# Altium PCB Encoder_MA702.PcbDoc
Units mm, origin at the board's own origin, x right, y up, seen from the top; angles counter-clockwise.
Board outline 19 x 19 mm, 2 copper layers (Top Layer, Bottom Layer), stack 0.8 mm thick; 6 components, 9 nets, 42 pads, 22 vias.
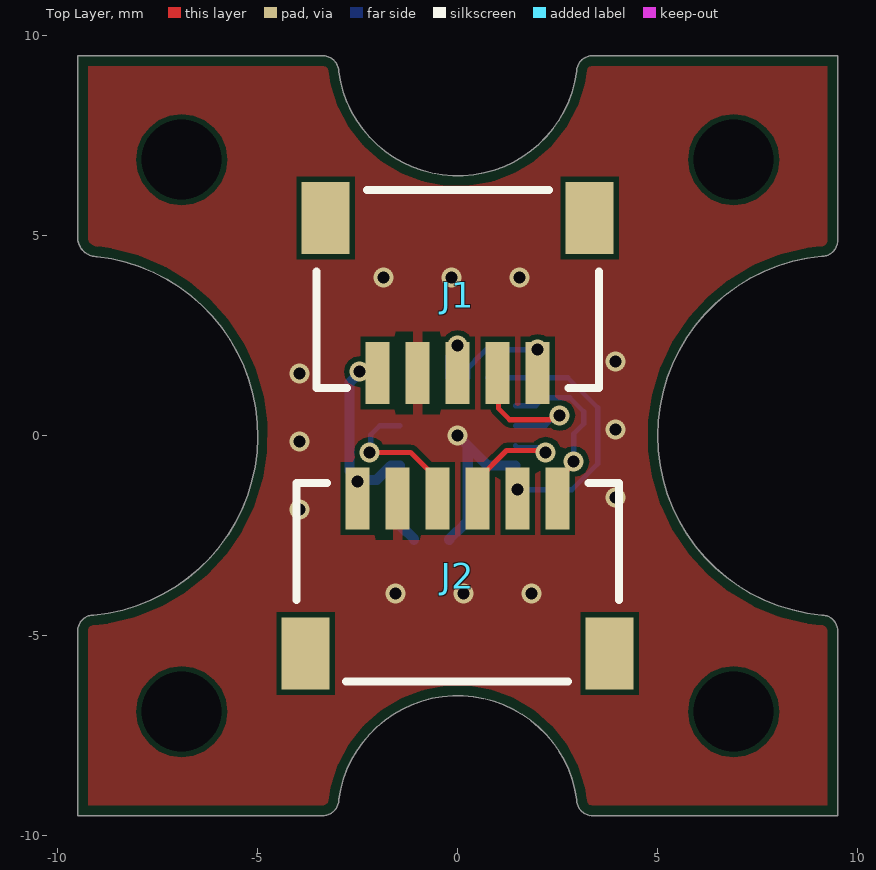
[diagram p0: Top Layer view]
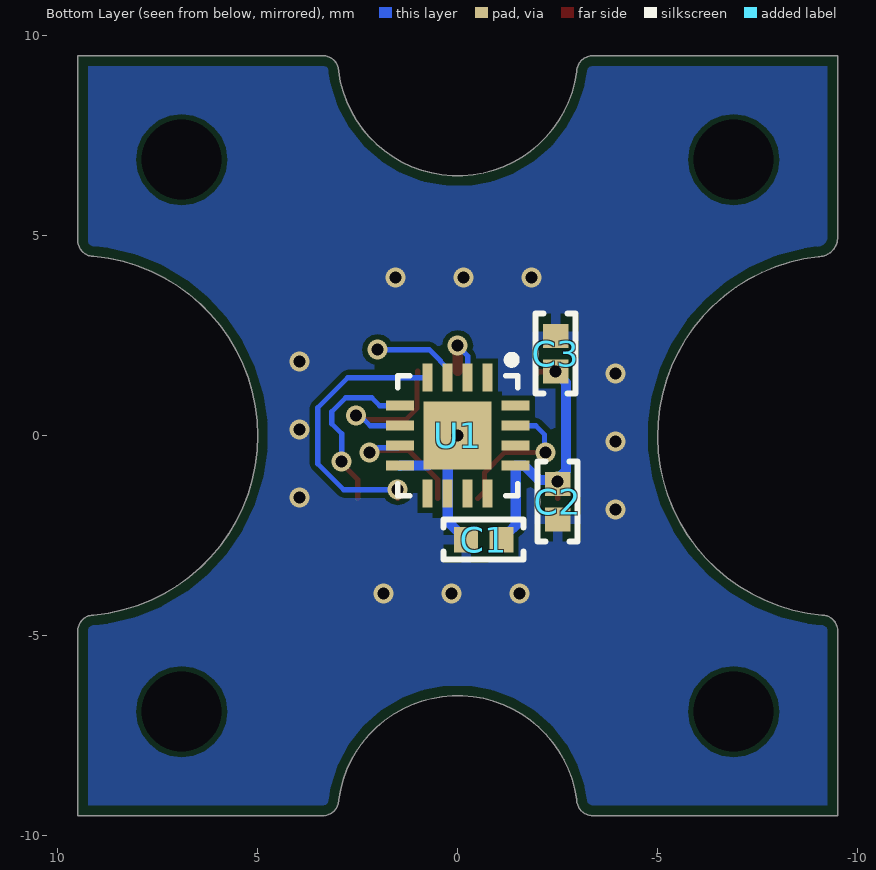
[diagram p1: Bottom Layer view, seen from below]
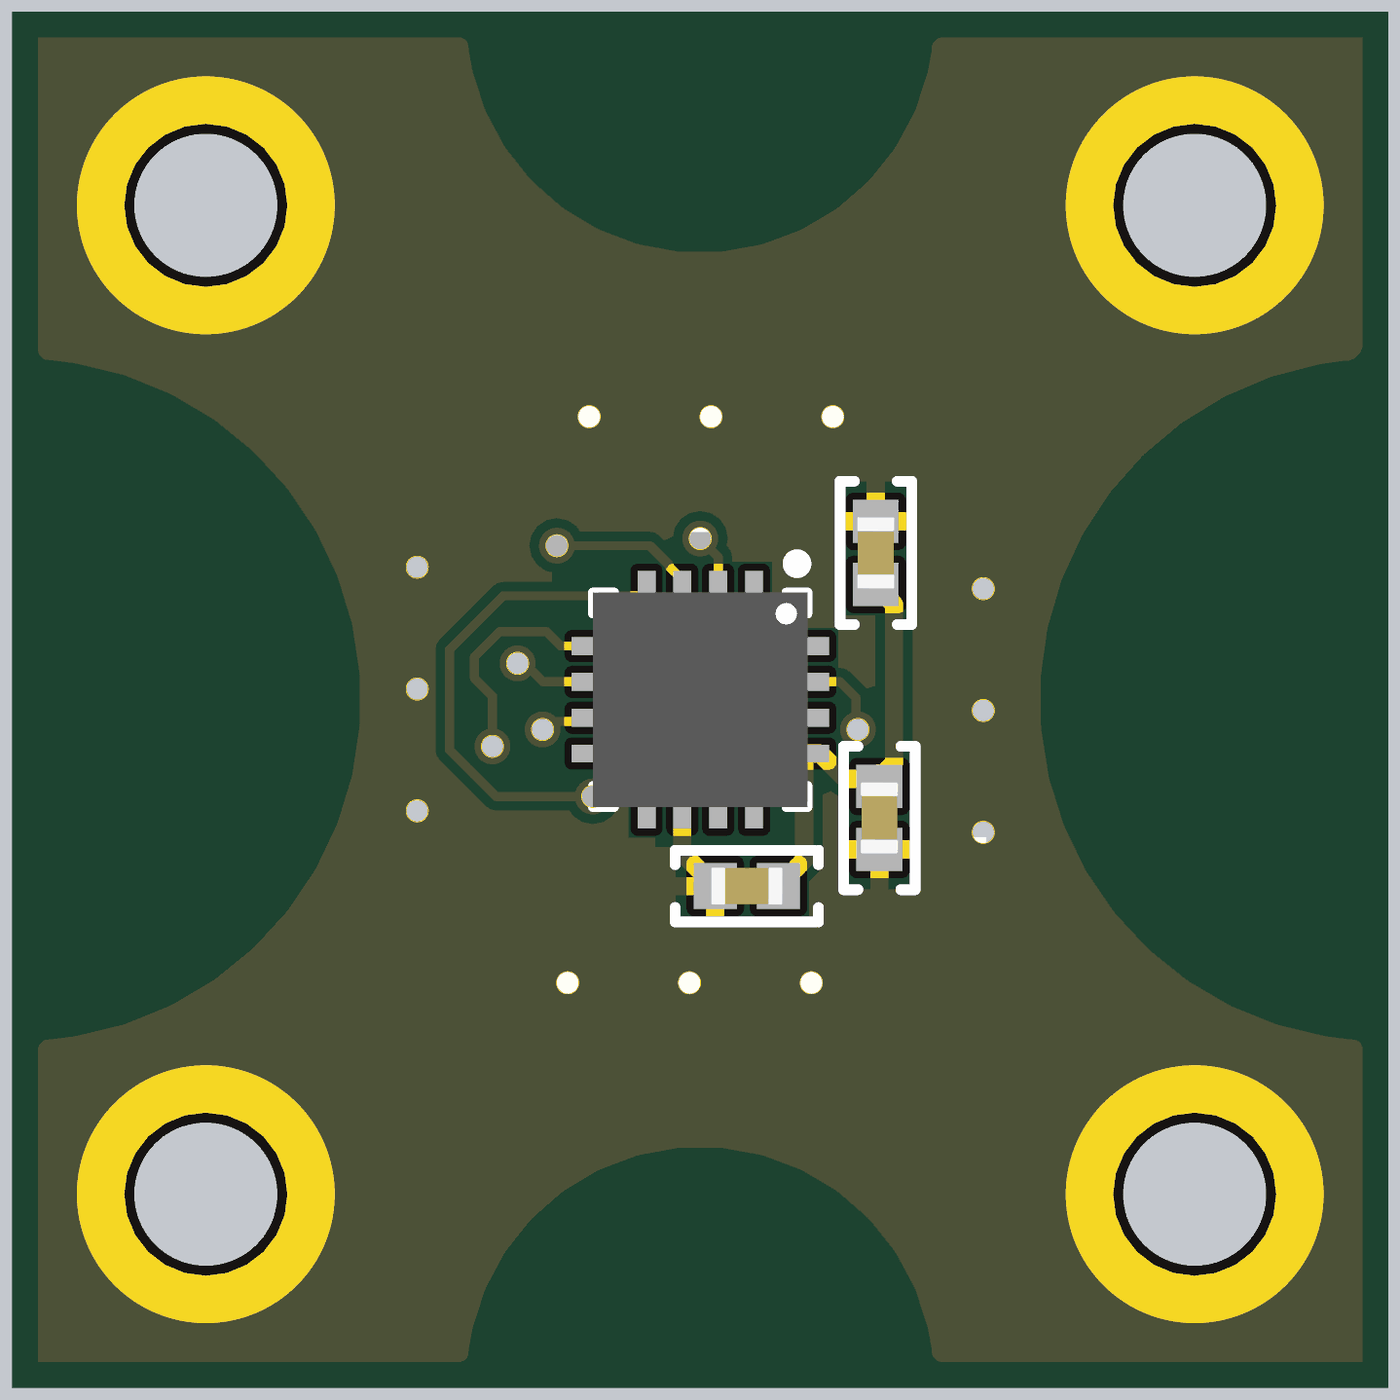
[diagram p2: 3D render of the assembled board from below, using the file's embedded part models]

## Layer stack, top to bottom
Top Solder: solder mask 0.01, Solder Resist, Dk 3.5
Top Layer: signal copper 0.035
Dielectric 1: dielectric 0.73, FR-4, Dk 4.8
Bottom Layer: signal copper 0.035
Bottom Solder: solder mask 0.01, Solder Resist, Dk 3.5

## Board outline
-9.5,-9.5 -3.378,-9.5 ccw(c-3.378,-9.097) -2.974,-9.097 cw(c0,-9.5) 2.975,-9.103 ccw(c3.372,-9.103) 3.372,-9.5 9.5,-9.5 9.5,-4.886 ccw(c9.097,-4.886) 9.097,-4.483 cw(c9.5,0) 9.097,4.483 ccw(c9.097,4.886) 9.5,4.886 9.5,9.5 3.367,9.5 ccw(c3.367,9.11) 2.976,9.11 cw(c0,9.5) -2.974,9.097 ccw(c-3.378,9.097) -3.378,9.5 -9.5,9.5 -9.5,4.961 ccw(c-9.014,4.961) -9.014,4.475 cw(c-9.5,0) -9.101,-4.483 ccw(c-9.101,-4.882) -9.5,-4.882

## Design rules (kind name [scope] priority, off if disabled: settings)
BoardOutlineClearance [All] p1: gap=0.254 ignorepadtopadclearanceinfootprint=FALSE except(0: Arc-SplitContinuation Track-SplitContinuation SMDPad-SplitContinuation THPad-SplitContinuation Via-SplitContinuation Fill-SplitContinuation Poly-SplitContinuation Region-SplitContinuation Text-SplitContinuation)
Clearance [All] p1: gap=0.128 ignorepadtopadclearanceinfootprint=FALSE
PlaneConnect [All] p1: pad.planeconnectstyle=Relief pad.reliefexpansion=0.508 pad.reliefentries=4 pad.reliefconductorwidth=0.254 pad.reliefairgap=0.254 via.planeconnectstyle=Direct via.reliefexpansion=0.508 via.reliefentries=4 via.reliefconductorwidth=0.254 via.reliefairgap=0.254
PolygonConnect [All] p1: thpad.connectstyle=Relief thpad.reliefconductorwidth=0.254 thpad.reliefentries=4 thpad.polygonreliefangle="90 Angle" thpad.airgapwidth=0.254 smdpad.connectstyle=Relief smdpad.reliefconductorwidth=0.254 smdpad.reliefentries=4 smdpad.polygonreliefangle="90 Angle" smdpad.airgapwidth=0.254 via.connectstyle=Direct via.reliefconductorwidth=0.254 via.reliefentries=4 via.polygonreliefangle="90 Angle" via.airgapwidth=0.254
RoutingVias [All] p1: holewidth=0.3 width=0.5 viastyle="Through Hole" minholewidth=0.3 minwidth=0.5 maxholewidth=0.7 maxwidth=1.27
SolderMaskExpansion [All] p1: expansion=0.102 istentingtop=FALSE
SupplyNets "Schematic Supply Nets_1" [InNet('GND')] p1: voltage=0.000
SupplyNets "Schematic Supply Nets" [InNet('VCC')] p2: voltage=0.000
Width [All] p1: maxlimit=0.254 minlimit=0.127 preferedwidth=0.254
29 further rules are at their usual default settings.

## Components (designator, comment, footprint, x,y, rotation, side; value= is the part's Value field where it differs from the comment)
C1 "0.1 µF" "CAP 0402_1005" -0.65,-2.6 r0 bottom
C2 "0.1 µF" "CAP 0402_1005" -2.5,-1.65 r270 bottom
C3 "0.1 µF" "CAP 0402_1005" -2.45,2.05 r90 bottom
J1 "SM05B-SRSS-TB(LF)(SN)" "JST SM05B-SRSS-TB" 0,3.6 r0 top
J2 "SM06B-SRSS-TB(LF)(SN)" "JST SM06B-SRSS-TB" 0,-3.6 r180 top
U1 "MA702" IC_MA702GQ-Z 0,0 r270 bottom

## Footprints (in the part's own frame and the unit in brackets; to place one, negate y for a bottom-side part, rotate by r counter-clockwise, add the part's x,y. Pads: shape width x height; smd on the part's side, far side on the other; paste and mask are expansions set on the pad)
"CAP 0402_1005" [mm] "Chip Capacitor, 2-Leads, Body 1.02x0.51mm, IPC Medium Density"
  rect 0.6x0.64 smd: 1(-0.44,0) 2(0.44,0)
  silkscreen extent -1,-0.5 1,0.5, body extent -0.5,-0.26 0.5,0.26, height 0.52
IC_MA702GQ-Z [mm]
  rect 0.7x0.25 smd: 1(-1.45,0.75) 2(-1.45,0.25) 3(-1.45,-0.25) 4(-1.45,-0.75) 9(1.45,-0.75) 10(1.45,-0.25) 11(1.45,0.25) 12(1.45,0.75)
  rect 0.25x0.7 smd: 5(-0.75,-1.445) 6(-0.25,-1.445) 7(0.25,-1.445) 8(0.75,-1.445) 13(0.75,1.45) 14(0.25,1.45) 15(-0.25,1.45) 16(-0.75,1.45)
  rect 1.7x1.7 smd paste-0.328: 17(0,0)
  silkscreen extent -2,-1.5 1.5,1.5, body extent -1.5,-1.5 1.5,1.5, height 1
"JST SM05B-SRSS-TB" [mm] "1.0mm pitch/Disconnectable Crimp style connector"
  rect 0.6x1.55 smd: 1(-2,-2.032) 2(-1,-2.032) 3(0,-2.032) 4(1,-2.032) 5(2,-2.032)
  rect 1.2x1.8 smd: M(-3.3,1.843) M(3.3,1.843)
  silkscreen extent -3.53,-2.41 3.53,2.54, body extent -3.5,-2.38 3.5,2.57, height 2.95
"JST SM06B-SRSS-TB" [mm] "1.0mm pitch/Disconnectable Crimp style connector"
  rect 0.6x1.55 smd: 1(-2.5,-2.032) 2(-1.5,-2.032) 3(-0.5,-2.032) 4(0.5,-2.032) 5(1.5,-2.032) 6(2.5,-2.032)
  rect 1.2x1.8 smd: M(-3.8,1.843) M(3.8,1.843)
  silkscreen extent -4.03,-2.41 4.03,2.54, body extent -4,-2.38 4,2.57, height 2.95

## Part data
C1 C2 C3: library part C0402C104K3RAC7867, "CAP CER 0.1UF 25V X7R 0402", Device Package="0402 (1005 Metric)", Manufacturer=KEMET, Operating Temperature="-55°C ~ 125°C", Supplier Part Number 1=399-14148-1-ND, Temperature Coefficient=X7R, Tolerance=±10%, Voltage - Rated=25V, Applications="Bypass, Decoupling", Capacitance="0.1 µF", ComponentLink1Description=Datasheet, ComponentLink1URL=https://api.kemet.com/component-edge/download/datasheet/C0402C104K3RAC7867.pdf, ComponentLink2Description="DigiKey Link", ComponentLink2URL=https://www.digikey.com/en/products/detail/kemet/C0402C104K3RAC7867/6697176, LastUpdated="2/9/2024 8:04:32 PM", Lifecycle Status=Active, Minimum Order=1, Mounting Type="Surface Mount, MLCC", Package / Case="0402 (1005 Metric)", Packaging=TapeAndReel, Part Number=C0402C104K3RAC7867, Part Status=Active, PartId=39011, Price=0.02, Series="SMD Comm X7R", Size / Dimension="0.039\" L x 0.020\" W (1.00mm x 0.50mm)", Supplier 1=DigiKey, Thickness (Max)="0.022\" (0.55mm)"
J1: "CONN HEADER SMD R/A 5POS 1MM", Current Rating (Amps)=0.7A, Insulation Color=Natural, Manufacturer="JST Sales America Inc.", Material Flammability Rating="UL94 V-0", Operating Temperature="-25°C ~ 85°C", Supplier Part Number 1=455-1805-1-ND, Voltage Rating=50V, ComponentLink1Description=Datasheet, ComponentLink1URL=http://www.jst-mfg.com/product/pdf/eng/eSH.pdf, ComponentLink2Description="DigiKey Link", ComponentLink2URL=http://digikey.com/product-detail/en/jst-sales-america-inc/SM05B-SRSS-TB-LF-SN/455-1805-1-ND/926876, Connector Type=Header, Contact Finish - Mating=Tin, Contact Finish - Post=Tin, Contact Material="Copper Alloy", Contact Shape=Square, Contact Type="Male Pin", Fastening Type=Push-Pull, Features="Solder Retention", Insulation Height="0.114\" (2.90mm)", Insulation Material="Polyamide (PA), Nylon", LastUpdated="1/12/2020 11:42:04 PM", Lifecycle Status=Active, Minimum Order=1, Mounting Type="Surface Mount, Right Angle", Number of Positions=5, Number of Positions Loaded=All, Number of Rows=1, Packaging=TapeAndReel, Part Number=SM05B-SRSS-TB(LF)(SN), Part Status=Active, PartId=63, Pitch - Mating="0.039\" (1.00mm)", Price=0.32, Series=SR, Shrouding="Shrouded - 4 Wall", Style="Board to Cable/Wire", Supplier 1=DigiKey, Termination=Solder
J2: "CONN HEADER SMD R/A 6POS 1MM", Current Rating (Amps)=0.7A, Insulation Color=Natural, Manufacturer="JST Sales America Inc.", Material Flammability Rating="UL94 V-0", Operating Temperature="-25°C ~ 85°C", Supplier Part Number 1=455-1806-1-ND, Voltage Rating=50V, ComponentLink1Description=Datasheet, ComponentLink1URL=http://www.jst-mfg.com/product/pdf/eng/eSH.pdf, ComponentLink2Description="DigiKey Link", ComponentLink2URL=http://digikey.com/product-detail/en/jst-sales-america-inc/SM06B-SRSS-TB-LF-SN/455-1806-1-ND/926877, Connector Type=Header, Contact Finish - Mating=Tin, Contact Finish - Post=Tin, Contact Material="Copper Alloy", Contact Shape=Square, Contact Type="Male Pin", Fastening Type=Push-Pull, Features="Solder Retention", Insulation Height="0.114\" (2.90mm)", Insulation Material="Polyamide (PA), Nylon", LastUpdated="1/12/2020 11:42:14 PM", Lifecycle Status=Active, Minimum Order=1, Mounting Type="Surface Mount, Right Angle", Number of Positions=6, Number of Positions Loaded=All, Number of Rows=1, Packaging=TapeAndReel, Part Number=SM06B-SRSS-TB(LF)(SN), Part Status=Active, PartId=64, Pitch - Mating="0.039\" (1.00mm)", Price=0.36, Series=SR, Shrouding="Shrouded - 4 Wall", Style="Board to Cable/Wire", Supplier 1=DigiKey, Termination=Solder
U1: "Hall effect encoder"

## Free pads (board coordinates)
  round 0 hole 2 unplated: 1(-6.9,-6.9) 1(-6.9,6.9) 1(6.9,-6.9) 1(6.9,6.9)

## Via types
v1: diameter 0.5, hole 0.3, Top Layer to Bottom Layer, tented both sides, 22 vias

## Nets (pads, with @x,y where several pads share a name; then routed paths per layer and width w, separated by ;. In a path a pad name is that pad's centre, name@x,y a point inside that pad or via, vN(x,y) a via of type N, cw(c..) or ccw(c..) an arc to the next point about the centre after c; other vN are vias at no path point)
A: J1.3 U1.2 | length 1.5
  Top Layer w0.254: J1.3@0,1.618 v1(0,2.25)
  Bottom Layer w0.127: U1.2 -0.25,1.991 0,2.241 v1(0,2.25)
B: J1.4 U1.6 | length 3.8
  Top Layer w0.127: J1.4@1,1.618 1,1.468 1.023,1.445 1.023,0.677 1.3,0.4 2.3,0.4 2.337,0.437 2.478,0.437 v1(2.549,0.509)
  Bottom Layer w0.127: U1.6 2.189,0.25 2.448,0.509 v1(2.549,0.509)
C\S\: J2.1 U1.5 | length 4.4
  Top Layer w0.127: J2.1 2.5,-1.093 2.9,-0.693 v1(2.9,-0.65)
  Bottom Layer w0.127: U1.5 1.95,0.75 2.15,0.95 2.8,0.95 3.15,0.6 3.15,0.3 2.9,0.05 v1(2.9,-0.65)
GND: C1.2 C2.2 C3.2 J1.2 J2.5 U1.8 U1.10 U1.17 | length 4.3
  Bottom Layer w0.254: C1.2 -0.21,-2.58 -0.037,-2.407 -0.017,-2.407 0.25,-2.14 U1.17@0.25,-0.25 ; v1(0,0) U1.17@0.25,-0.25 ; U1.8 1.443,-0.748 0.748,-0.748 U1.17@0.25,-0.25
  other v1: -1.55,-3.95 0.15,-3.95 1.85,-3.95 -3.95,-1.85 3.95,-1.55 -3.95,-0.15 3.95,0.15 -3.95,1.55 3.95,1.85 -1.85,3.95 -0.15,3.95 1.55,3.95
I: J1.5 U1.3 | length 2.2
  Bottom Layer w0.127: U1.3 0.25,1.675 0.433,1.859 0.433,1.879 0.704,2.15 v1(2,2.15)
MISO: J2.3 U1.7 | length 3.3
  Top Layer w0.127: J2.3 0.5,-1.093 1.222,-0.371 2.156,-0.371 v1(2.2,-0.415)
  Bottom Layer w0.127: U1.7 1.496,-0.301 1.986,-0.301 2.099,-0.415 v1(2.2,-0.415)
MOSI: J2.2 U1.4 | length 6.9
  Top Layer w0.127: J2.2 v1(1.5,-1.35)
  Bottom Layer w0.127: U1.4 2.75,1.45 3.5,0.7 3.5,-0.7 2.85,-1.35 v1(1.5,-1.35)
SCLK: J2.4 U1.15 | length 3.7
  Top Layer w0.127: v1(-2.2,-0.415) -1.178,-0.415 -0.673,-0.92 -0.673,-1.395 J2.4
  Bottom Layer w0.127: v1(-2.2,-0.415) -2.175,-0.39 -2.175,0.025 -1.95,0.25 U1.15
VCC: C1.1 C2.1 C3.1 J1.1 J2.6 U1.13 | length 7
  Top Layer w0.127: J2.6 v1(-2.5,-1.15) ; v1(-2.45,1.6) -2.032,1.6 J1.1
  Bottom Layer w0.254: v1(-2.45,1.6) -2.45,1.583 -2.705,1.328 -2.705,-0.878 -2.5,-1.083 v1(-2.5,-1.15) -2.453,-1.103 -2.024,-1.103 -1.671,-0.75 U1.13 -1.45,-2.24 -1.283,-2.407 -1.263,-2.407 -1.09,-2.58 C1.1
pads on no net: J1.M J2.M U1.1 U1.9 U1.11 U1.12 U1.14 U1.16

## Polygon pours and split planes (outlines as drawn)
GND on Bottom Layer "NONET_L02_P-001" (solid, pour order 0): -9.5,9.5 -9.5,-9.5 9.5,-9.5 9.5,9.5
GND on Top Layer "NONET_L02_P-001" (solid, pour order 1): -9.5,9.5 -9.5,-9.5 9.5,-9.5 9.5,9.5

## Silkscreen, mask and mechanical layers (free items; w line width, h text height)
Top Solder:
  circle w0.8: c6.9,-6.9 r1.4
  circle w0.8: c6.9,6.9 r1.4
  circle w0.8: c-6.9,6.9 r1.4
  circle w0.8: c-6.9,-6.9 r1.4
Bottom Solder:
  circle w0.8: c6.9,6.9 r1.4
  circle w0.8: c6.9,-6.9 r1.4
  circle w0.8: c-6.9,6.9 r1.4
  circle w0.8: c-6.9,-6.9 r1.4
Board Outline:
  lines w0.2: -3.5,-9.5 -3.378,-9.5 ccw(c-3.378,-9.097) -2.974,-9.097 cw(c0,-9.5) 2.975,-9.103 ccw(c3.372,-9.103) 3.372,-9.5 3.85,-9.5 9.5,-9.5 9.5,-5.1 9.5,-4.886 ccw(c9.097,-4.886) 9.097,-4.483 cw(c9.5,0) 9.097,4.483 ccw(c9.097,4.886) 9.5,4.886 9.5,5.1 9.5,9.5 3.75,9.5 3.367,9.5 ccw(c3.367,9.11) 2.976,9.11 cw(c0,9.5) -2.974,9.097 ccw(c-3.378,9.097) -3.378,9.5 -3.6,9.5 -9.5,9.5 -9.5,4.961 ccw(c-9.014,4.961) -9.014,4.475 cw(c-9.5,0) -9.101,-4.483 ccw(c-9.101,-4.882) -9.5,-4.882 -9.5,-5.1 -9.5,-9.5 -3.5,-9.5 ; -3.5,-9.5 -3.5,-9.5

## Dimensions
-9.5,-9.5 to -9.5,9.5 on Dimensions
-9.5,-9.5 to 9.5,-9.5 on Dimensions